# EAGLE board registers_full_wiring2 (EAGLE 9.5.2)
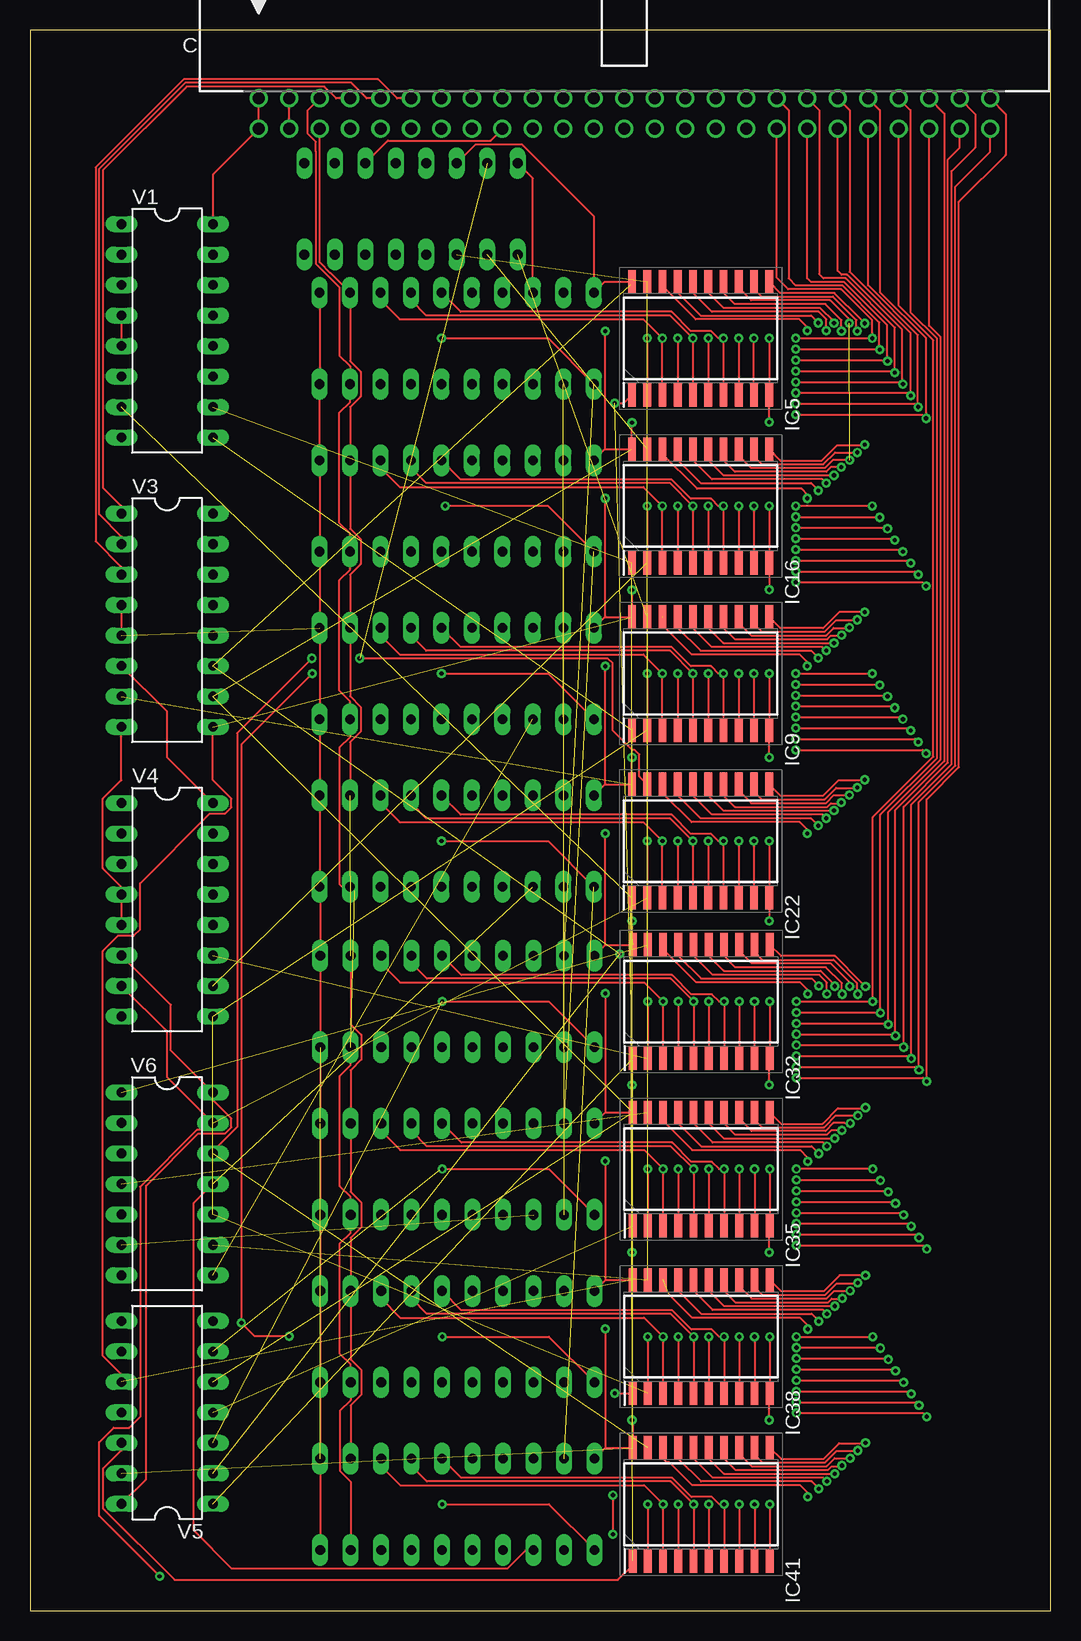
[diagram p0: board, top side]
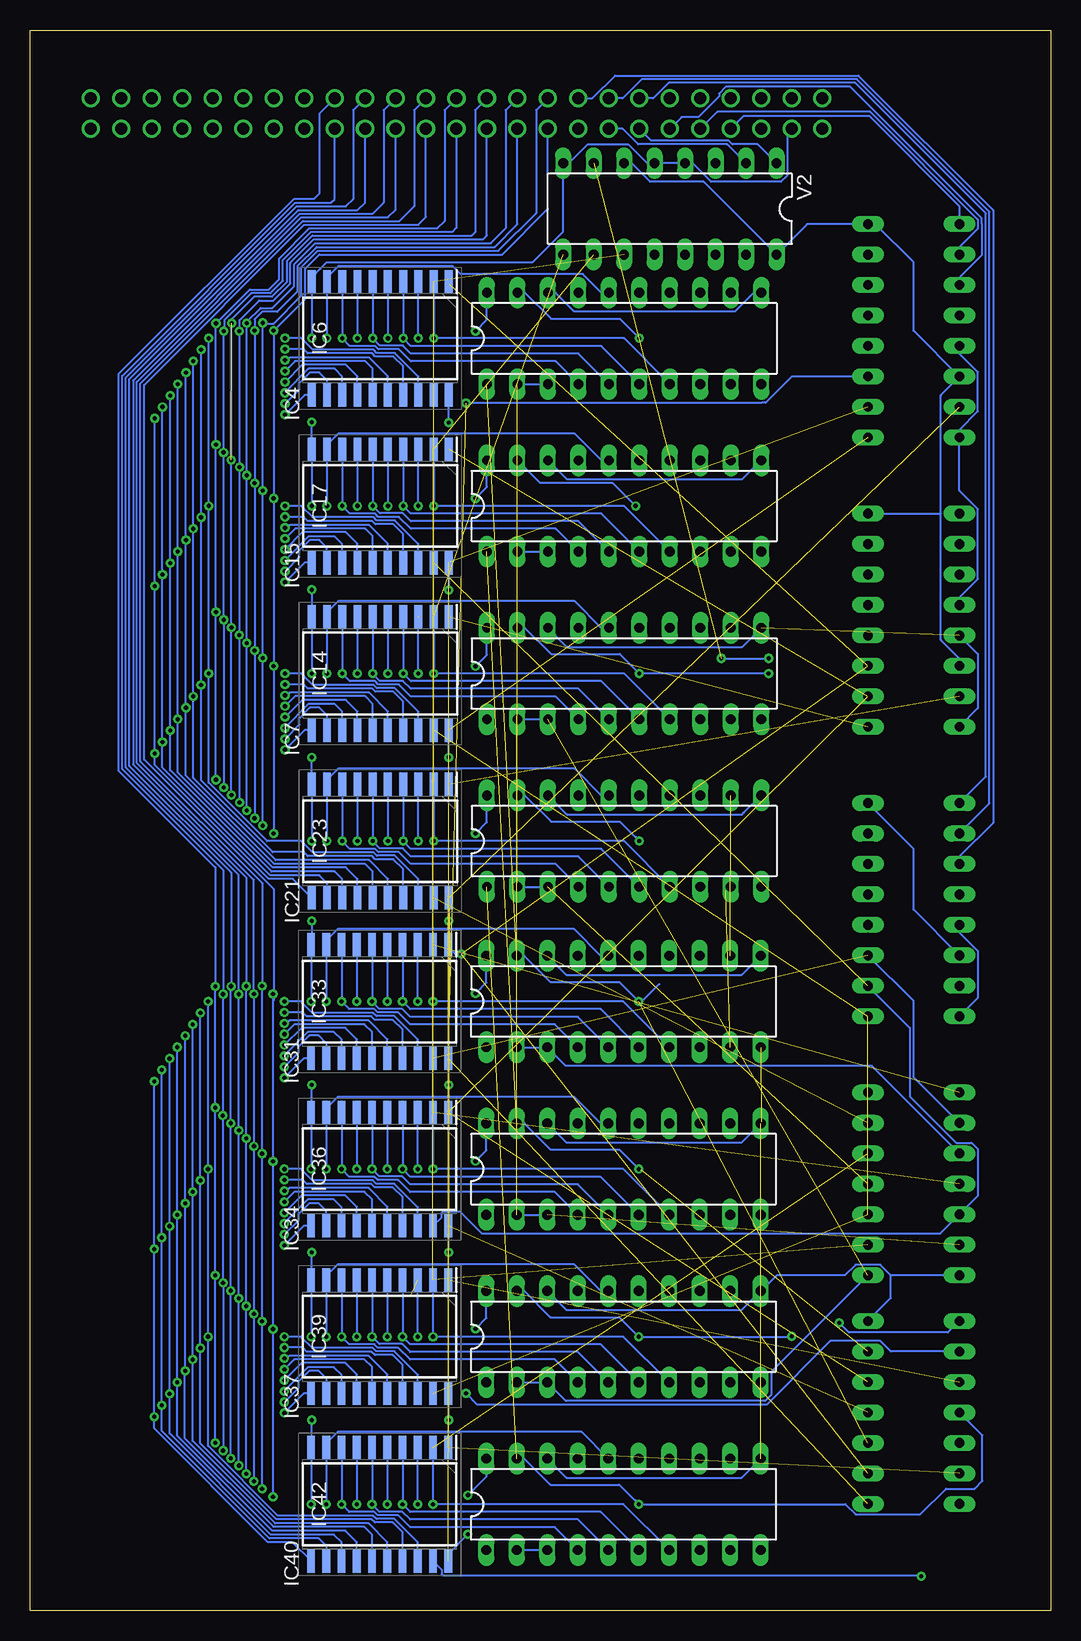
[diagram p1: board, bottom side, seen from below]

Size 85.07 x 131.75 mm. Coordinates in mm from the lower left corner, seen from the top.
Outline: 0,0 85.07,0 85.07,131.75 0,131.75 0,0
Copper layers (1*16): Top 0.035mm / dielectric 1.5mm / Bottom 0.035mm
Design rules "default *": minimum track width 6mil, minimum drill 0.35mm, track to track 6mil, track to pad 6mil, pad to pad 6mil, via to via 6mil, smd to smd 6mil, copper to edge 40mil, drill to drill 6mil, minimum pad ring 10mil, minimum via ring 8mil, stop-mask expansion 4mil, vias tented up to drill 0mil, thermal gap 10mil
tRestrict: area 61.9,5.1 to 81.6,126.4; area 61.9,5.1 to 62.2,126.4
bRestrict: area 41.6,5.1 to 77.8,126.4; area 41.9,113 to 61,125.7

## Footprints (pad centres in the part's own frame; a part is rotated, then mirrored left to right if it is on the bottom)
PAK100/2500-5-50 = drill 1 pad 1.422: 1 -30.48,-1.27; 2 -30.48,1.27; 3 -27.94,-1.27; 4 -27.94,1.27; 5 -25.4,-1.27; 6 -25.4,1.27; 7 -22.86,-1.27; 8 -22.86,1.27; 9 -20.32,-1.27; 10 -20.32,1.27; 11 -17.78,-1.27; 12 -17.78,1.27; 13 -15.24,-1.27; 14 -15.24,1.27; 15 -12.7,-1.27; 16 -12.7,1.27; 17 -10.16,-1.27; 18 -10.16,1.27; 19 -7.62,-1.27; 20 -7.62,1.27; 21 -5.08,-1.27; 22 -5.08,1.27; 23 -2.54,-1.27; 24 -2.54,1.27; 25 0,-1.27; 26 0,1.27; 27 2.54,-1.27; 28 2.54,1.27; 29 5.08,-1.27; 30 5.08,1.27; 31 7.62,-1.27; 32 7.62,1.27; 33 10.16,-1.27; 34 10.16,1.27; 35 12.7,-1.27; 36 12.7,1.27; 37 15.24,-1.27; 38 15.24,1.27; 39 17.78,-1.27; 40 17.78,1.27; 41 20.32,-1.27; 42 20.32,1.27; 43 22.86,-1.27; 44 22.86,1.27; 45 25.4,-1.27; 46 25.4,1.27; 47 27.94,-1.27; 48 27.94,1.27; 49 30.48,-1.27; 50 30.48,1.27
DIL20 = drill 0.813 long: 1 -11.43,-3.81; 2 -8.89,-3.81; 3 -6.35,-3.81; 4 -3.81,-3.81; 5 -1.27,-3.81; 6 1.27,-3.81; 7 3.81,-3.81; 8 6.35,-3.81; 9 8.89,-3.81; 10 11.43,-3.81; 11 11.43,3.81; 12 8.89,3.81; 13 6.35,3.81; 14 3.81,3.81; 15 1.27,3.81; 16 -1.27,3.81; 17 -3.81,3.81; 18 -6.35,3.81; 19 -8.89,3.81; 20 -11.43,3.81
SOIC127P1030X265-20N = smd 1.95 x 0.65: 1 -4.725,5.715; 2 -4.725,4.445; 3 -4.725,3.175; 4 -4.725,1.905; 5 -4.725,0.635; 6 -4.725,-0.635; 7 -4.725,-1.905; 8 -4.725,-3.175; 9 -4.725,-4.445; 10 -4.725,-5.715; 11 4.725,-5.715; 12 4.725,-4.445; 13 4.725,-3.175; 14 4.725,-1.905; 15 4.725,-0.635; 16 4.725,0.635; 17 4.725,1.905; 18 4.725,3.175; 19 4.725,4.445; 20 4.725,5.715
DIL16 = drill 0.813 long: 1 -8.89,-3.81; 2 -6.35,-3.81; 3 -3.81,-3.81; 4 -1.27,-3.81; 5 1.27,-3.81; 6 3.81,-3.81; 7 6.35,-3.81; 8 8.89,-3.81; 9 8.89,3.81; 10 6.35,3.81; 11 3.81,3.81; 12 1.27,3.81; 13 -1.27,3.81; 14 -3.81,3.81; 15 -6.35,3.81; 16 -8.89,3.81
DIL14 = drill 0.813 long: 1 -7.62,-3.81; 2 -5.08,-3.81; 3 -2.54,-3.81; 4 0,-3.81; 5 2.54,-3.81; 6 5.08,-3.81; 7 7.62,-3.81; 8 7.62,3.81; 9 5.08,3.81; 10 2.54,3.81; 11 0,3.81; 12 -2.54,3.81; 13 -5.08,3.81; 14 -7.62,3.81

## Placement (x,y rotation side)
C  2550-5  [PAK100/2500-5-50]  49.53,124.78 0 top
IC4  74HCT299N  [DIL20]  35.56,106.05 0 bottom
IC5  SN74CBT3345DW  [SOIC127P1030X265-20N]  55.88,106.05 90 top
IC6  SN74CBT3345DW  [SOIC127P1030X265-20N]  55.88,106.05 270 bottom
IC7  74HCT299N  [DIL20]  35.56,78.11 0 bottom
IC9  SN74CBT3345DW  [SOIC127P1030X265-20N]  55.88,78.11 90 top
IC14  SN74CBT3345DW  [SOIC127P1030X265-20N]  55.88,78.11 270 bottom
IC15  74HCT299N  [DIL20]  35.56,92.08 0 bottom
IC16  SN74CBT3345DW  [SOIC127P1030X265-20N]  55.88,92.08 90 top
IC17  SN74CBT3345DW  [SOIC127P1030X265-20N]  55.88,92.08 270 bottom
IC21  74HCT299N  [DIL20]  35.56,64.14 0 bottom
IC22  SN74CBT3345DW  [SOIC127P1030X265-20N]  55.88,64.14 90 top
IC23  SN74CBT3345DW  [SOIC127P1030X265-20N]  55.88,64.14 270 bottom
IC31  74HCT299N  [DIL20]  35.61,50.77 0 bottom
IC32  SN74CBT3345DW  [SOIC127P1030X265-20N]  55.93,50.77 90 top
IC33  SN74CBT3345DW  [SOIC127P1030X265-20N]  55.93,50.77 270 bottom
IC34  74HCT299N  [DIL20]  35.61,36.8 0 bottom
IC35  SN74CBT3345DW  [SOIC127P1030X265-20N]  55.93,36.8 90 top
IC36  SN74CBT3345DW  [SOIC127P1030X265-20N]  55.93,36.8 270 bottom
IC37  74HCT299N  [DIL20]  35.61,22.83 0 bottom
IC38  SN74CBT3345DW  [SOIC127P1030X265-20N]  55.93,22.83 90 top
IC39  SN74CBT3345DW  [SOIC127P1030X265-20N]  55.93,22.83 270 bottom
IC40  74HCT299N  [DIL20]  35.61,8.86 0 bottom
IC41  SN74CBT3345DW  [SOIC127P1030X265-20N]  55.93,8.86 90 top
IC42  SN74CBT3345DW  [SOIC127P1030X265-20N]  55.93,8.86 270 bottom
V1  74238N  [DIL16]  11.43,106.68 270 top
V2  74138N  [DIL16]  31.75,116.84 180 bottom
V3  74238N  [DIL16]  11.43,82.55 270 top
V4  74138N  [DIL16]  11.43,58.42 270 top
V5  7432N  [DIL14]  11.43,16.51 90 top
V6  7408N  [DIL14]  11.43,35.56 270 top

## Library data of the parts
C = con-3m; OC_FARNELL: 1788696; OC_NEWARK: unknown
IC4 IC7 IC15 IC21 IC31 IC34 IC37 IC40 = 74xx-eu
IC5 IC6 IC9 IC14 IC16 IC17 IC22 IC23 IC32 IC33 IC35 IC36 IC38 IC39 IC41 IC42 = SamacSys_Parts; DESCRIPTION: Texas Instruments SN74CBT3345DW, Bus Switch, 8 x 1:1, 4.5 5.5 V, 20-Pin SOIC; HEIGHT: 2.65mm; MANUFACTURER_NAME: Texas Instruments; MANUFACTURER_PART_NUMBER: SN74CBT3345DW
V1-V6 = 74ttl-din

## Nets
BUSA_BIT0: C.19 IC5.18 IC9.18 IC16.18 IC22.18
BUSA_BIT1: C.20 IC5.17 IC9.17 IC16.17 IC22.17
BUSA_BIT2: C.21 IC5.16 IC9.16 IC16.16 IC22.16
BUSA_BIT3: C.22 IC5.15 IC9.15 IC16.15 IC22.15
BUSA_BIT4: C.23 IC5.14 IC9.14 IC16.14 IC22.14
BUSA_BIT5: C.24 IC5.13 IC9.13 IC16.13 IC22.13
BUSA_BIT6: C.25 IC5.12 IC9.12 IC16.12 IC22.12
BUSA_BIT7: C.26 IC5.11 IC9.11 IC16.11 IC22.11
BUSA_BIT8: C.27 IC32.18 IC35.18 IC38.18 IC41.18
BUSA_BIT9: C.28 IC32.17 IC35.17 IC38.17 IC41.17
BUSA_BIT10: C.29 IC32.16 IC35.16 IC38.16 IC41.16
BUSA_BIT11: C.30 IC32.15 IC35.15 IC38.15 IC41.15
BUSA_BIT12: C.31 IC32.14 IC35.14 IC38.14 IC41.14
BUSA_BIT13: C.32 IC32.13 IC35.13 IC38.13 IC41.13
BUSA_BIT14: C.33 IC32.12 IC35.12 IC38.12 IC41.12
BUSA_BIT15: C.34 IC32.11 IC35.11 IC38.11 IC41.11
BUSA_REGIN0: C.7 V1.1
BUSA_REGIN1: C.9 V1.2
BUSA_REGIN2: C.11 V1.3
BUSA_REGOUT0: C.13 V2.1
BUSA_REGOUT1: C.15 V2.2
BUSA_REGOUT2: C.17 V2.3
BUSB_BIT0: C.35 IC6.18 IC14.18 IC17.18 IC23.18
BUSB_BIT1: C.36 IC6.17 IC14.17 IC17.17 IC23.17
BUSB_BIT2: C.37 IC6.16 IC14.16 IC17.16 IC23.16
BUSB_BIT3: C.38 IC6.15 IC14.15 IC17.15 IC23.15
BUSB_BIT4: C.39 IC6.14 IC14.14 IC17.14 IC23.14
BUSB_BIT5: C.40 IC6.13 IC14.13 IC17.13 IC23.13
BUSB_BIT6: C.41 IC6.12 IC14.12 IC17.12 IC23.12
BUSB_BIT7: C.42 IC6.11 IC14.11 IC17.11 IC23.11
BUSB_BIT8: C.43 IC33.18 IC36.18 IC39.18 IC42.18
BUSB_BIT9: C.44 IC33.17 IC36.17 IC39.17 IC42.17
BUSB_BIT10: C.45 IC33.16 IC36.16 IC39.16 IC42.16
BUSB_BIT11: C.46 IC33.15 IC36.15 IC39.15 IC42.15
BUSB_BIT12: C.47 IC33.14 IC36.14 IC39.14 IC42.14
BUSB_BIT13: C.48 IC33.13 IC36.13 IC39.13 IC42.13
BUSB_BIT14: C.49 IC33.12 IC36.12 IC39.12 IC42.12
BUSB_BIT15: C.50 IC33.11 IC36.11 IC39.11 IC42.11
BUSB_REGIN0: C.8 V3.1
BUSB_REGIN1: C.10 V3.2
BUSB_REGIN2: C.12 V3.3
BUSB_REGOUT0: C.14 V4.1
BUSB_REGOUT1: C.16 V4.2
BUSB_REGOUT2: C.18 V4.3
CLK: C.5 IC4.12 IC7.12 IC15.12 IC21.12 IC31.12 IC34.12 IC37.12 IC40.12
GND: C.3 C.4 IC4.10 IC4.11 IC4.18 IC5.10 IC6.10 IC7.10 IC7.11 IC7.18 IC9.10 IC14.10 IC15.10 IC15.11 IC15.18 IC16.10 IC17.10 IC21.10 IC21.11 IC21.18 IC22.10 IC23.10 IC31.10 IC31.11 IC31.18 IC32.10 IC33.10 IC34.10 IC34.11 IC34.18 IC35.10 IC36.10 IC37.10 IC37.11 IC37.18 IC38.10 IC39.10 IC40.10 IC40.11 IC40.18 IC41.10 IC42.10 V1.4 V1.5 V1.8 V2.4 V2.5 V2.8 V3.4 V3.5 V3.8 V4.4 V4.5 V4.8 V5.7 V6.7
N$1: IC34.16 IC35.9 IC36.9
N$2: IC16.1 IC35.1 V1.10 V5.4
N$3: IC16.19 IC35.19 V2.10 V6.4
N$4: IC4.2 IC4.3 IC31.2 IC31.3 V6.3
N$5: IC4.7 IC5.2 IC6.2
N$6: IC4.13 IC5.3 IC6.3
N$7: IC4.6 IC5.4 IC6.4
N$8: IC4.14 IC5.5 IC6.5
N$9: IC4.5 IC5.6 IC6.6
N$10: IC4.15 IC5.7 IC6.7
N$11: IC4.4 IC5.8 IC6.8
N$12: IC5.1 IC32.1 V1.11 V5.1
N$14: IC5.19 IC32.19 V2.11 V6.1
N$15: IC4.16 IC5.9 IC6.9
N$17: IC6.19 IC33.19 V4.11 V6.2
N$18: IC15.1 IC15.19 IC34.1 IC34.19 V5.6
N$19: IC15.2 IC15.3 IC34.2 IC34.3 V6.6
N$20: IC4.1 IC4.19 IC31.1 IC31.19 V5.3
N$22: IC7.7 IC9.2 IC14.2
N$23: IC7.13 IC9.3 IC14.3
N$24: IC7.6 IC9.4 IC14.4
N$25: IC7.14 IC9.5 IC14.5
N$26: IC17.1 IC36.1 V3.10 V5.5
N$27: IC17.19 IC36.19 V4.10 V6.5
N$28: IC7.5 IC9.6 IC14.6
N$29: IC14.1 IC39.1 V3.9 V5.10
N$30: IC7.1 IC7.19 IC37.1 IC37.19 V5.8
N$31: IC7.2 IC7.3 IC37.2 IC37.3 V6.8
N$32: IC23.1 IC42.1 V3.7 V5.13
N$33: IC9.1 IC38.1 V1.9 V5.9
N$34: IC9.19 IC38.19 V2.9 V6.9
N$35: IC7.15 IC9.7 IC14.7
N$36: IC7.4 IC9.8 IC14.8
N$37: IC7.16 IC9.9 IC14.9
N$40: IC14.19 IC39.19 V4.9 V6.10
N$41: IC15.7 IC16.2 IC17.2
N$42: IC15.13 IC16.3 IC17.3
N$43: IC15.6 IC16.4 IC17.4
N$44: IC15.14 IC16.5 IC17.5
N$45: IC15.5 IC16.6 IC17.6
N$46: IC15.15 IC16.7 IC17.7
N$47: IC15.4 IC16.8 IC17.8
N$48: IC15.16 IC16.9 IC17.9
N$50: IC21.1 IC21.19 IC40.1 IC40.19 V5.11
N$51: IC22.1 IC41.1 V1.7 V5.12
N$52: IC23.19 IC42.19 V4.7 V6.13
N$55: IC22.19 IC41.19 V2.7 V6.12
N$63: IC21.7 IC22.2 IC23.2
N$64: IC21.13 IC22.3 IC23.3
N$65: IC21.6 IC22.4 IC23.4
N$66: IC21.14 IC22.5 IC23.5
N$67: IC21.5 IC22.6 IC23.6
N$68: IC21.15 IC22.7 IC23.7
N$69: IC21.4 IC22.8 IC23.8
N$70: IC21.16 IC22.9 IC23.9
N$121: IC31.7 IC32.2 IC33.2
N$122: IC31.13 IC32.3 IC33.3
N$125: IC31.6 IC32.4 IC33.4
N$126: IC31.14 IC32.5 IC33.5
N$129: IC31.5 IC32.6 IC33.6
N$130: IC31.15 IC32.7 IC33.7
N$131: IC31.4 IC32.8 IC33.8
N$132: IC31.16 IC32.9 IC33.9
N$133: IC34.7 IC35.2 IC36.2
N$134: IC34.13 IC35.3 IC36.3
N$135: IC34.6 IC35.4 IC36.4
N$136: IC34.14 IC35.5 IC36.5
N$139: IC34.5 IC35.6 IC36.6
N$140: IC34.15 IC35.7 IC36.7
N$141: IC34.4 IC35.8 IC36.8
N$143: IC37.7 IC38.2 IC39.2
N$144: IC37.13 IC38.3 IC39.3
N$145: IC37.6 IC38.4 IC39.4
N$146: IC37.14 IC38.5 IC39.5
N$149: IC37.5 IC38.6 IC39.6
N$150: IC37.15 IC38.7 IC39.7
N$151: IC37.4 IC38.8 IC39.8
N$152: IC37.16 IC38.9 IC39.9
N$153: IC40.7 IC41.2 IC42.2
N$154: IC40.13 IC41.3 IC42.3
N$155: IC40.6 IC41.4 IC42.4
N$156: IC40.14 IC41.5 IC42.5
N$157: IC21.2 IC21.3 IC40.2 IC40.3 V6.11
N$159: IC40.5 IC41.6 IC42.6
N$160: IC40.15 IC41.7 IC42.7
N$161: IC40.4 IC41.8 IC42.8
N$162: IC40.16 IC41.9 IC42.9
N$163: IC6.1 IC33.1 V3.11 V5.2
STARTUP: C.6 IC4.9 IC7.9 IC15.9 IC21.9 IC31.9 IC34.9 IC37.9 IC40.9
VCC: C.1 C.2 IC4.20 IC5.20 IC6.20 IC7.20 IC9.20 IC14.20 IC15.20 IC16.20 IC17.20 IC21.20 IC22.20 IC23.20 IC31.20 IC32.20 IC33.20 IC34.20 IC35.20 IC36.20 IC37.20 IC38.20 IC39.20 IC40.20 IC41.20 IC42.20 V1.6 V1.16 V2.6 V2.16 V3.6 V3.16 V4.6 V4.16 V5.14 V6.14

## Tracks (layer width: path | path; a pad name or v marks a point on that pad's centre or on a via)
BUSA_BIT0  (via drill 0.35)  (1 unrouted)
  Top 0.152: v64.77,106.68 64.77,107 64.12,107.64 55.48,107.64 52.61,110.51 52.58,110.51 IC5.18 | v64.77,92.71 64.77,93.03 64.29,93.5 55.58,93.5 52.58,96.51 IC16.18 | v64.77,78.74 64.77,79.06 64.14,79.69 55.13,79.69 52.69,82.14 52.69,82.86 | v64.77,64.77 64.77,65.09 64.14,65.72 55.13,65.72 52.7,68.15 IC22.18
  Bottom 0.152: v64.77,64.77 v64.77,78.74 v64.77,92.71 v64.77,106.68 62.15,109.3 62.15,111.84 60.96,113.03 45.72,113.03 41.91,116.84 C.19
BUSA_BIT1  (via drill 0.35)
  Top 0.152: v65.68,107.33 65.68,107.36 65.09,107.95 55.88,107.95 53.98,109.86 IC5.17 | v65.68,93.36 65.68,93.39 65.09,93.98 55.88,93.98 53.98,95.89 IC16.17 | v65.68,79.39 65.68,79.42 65.09,80.01 55.88,80.01 53.98,81.92 IC9.17 | v65.68,65.42 65.68,65.45 65.09,66.04 55.88,66.04 53.98,67.94 IC22.17
  Bottom 0.152: v65.68,65.42 v65.68,79.39 v65.68,93.36 v65.68,107.33 65.64,107.29 64.77,107.29 62.45,109.6 62.45,111.97 61.09,113.33 46.04,113.33 42.89,116.48 42.89,125.06 C.20
BUSA_BIT2  (via drill 0.35)
  Top 0.152: v66.36,106.68 66.36,107.63 65.72,108.27 56.83,108.27 55.24,109.86 IC5.16 | v66.36,93.98 66.04,94.3 56.83,94.3 55.24,95.89 IC16.16 | v66.36,80.01 66.04,80.33 56.83,80.33 55.24,81.92 IC9.16 | v66.36,66.04 66.04,66.36 56.83,66.36 55.24,67.94 IC22.16
  Bottom 0.152: v66.36,66.04 v66.36,80.01 v66.36,93.98 v66.36,106.68 66.36,107.63 65.72,108.27 64.45,108.27 62.76,109.96 62.76,112.09 61.19,113.67 46.35,113.67 44.45,115.57 C.21
BUSA_BIT3  (via drill 0.35)
  Top 0.152: IC5.15 56.52,109.86 57.77,108.6 65.82,108.6 67,107.42 v67,107.32 | IC16.15 56.52,95.89 57.77,94.63 v67,94.63 v67,94.62 | IC9.15 56.52,81.92 57.77,80.66 v67,80.66 v67,80.65 | IC22.15 56.52,67.94 57.78,66.68 v67,66.68
  Bottom 0.152: C.22 45.43,125.06 45.43,115.21 46.67,113.97 61.31,113.97 63.06,112.22 63.06,110.41 64.9,108.57 65.85,108.57 67,107.42 v67,107.32 v67,94.62 v67,80.65 v67,66.68
BUSA_BIT4  (via drill 0.35, 0.35 pad 0.55)
  Top 0.152: IC5.14 57.78,109.86 58.74,108.9 66.28,108.9 67.61,107.57 67.61,106.67 v67.63,106.65 | IC16.14 57.78,95.89 58.74,94.93 66.36,94.93 66.73,95.3 v67.61,95.3 | IC9.14 57.78,81.92 58.74,80.96 66.45,80.96 66.75,81.26 67.59,81.26 v67.63,81.31 | IC22.14 57.78,67.94 58.74,66.99 66.45,66.99 66.75,67.29 67.53,67.29 v67.61,67.36
  Bottom 0.152: C.23 46.99,114.62 47.31,114.3 61.41,114.3 63.37,112.34 63.37,110.62 64.79,109.2 65.98,109.2 67.61,107.57 67.61,106.67 v67.63,106.65 67.61,106.63 v67.61,95.3 67.61,81.33 | v67.61,67.36 67.61,81.33 | v67.63,81.31 67.61,81.33
BUSA_BIT5  (via drill 0.35, 0.35 pad 0.55)  (1 unrouted)
  Top 0.152: IC5.13 59.05,110.25 60.09,109.22 66.67,109.22 68.26,107.63 v68.26,107.31 | IC16.13 59.05,96.28 60.09,95.25 66.24,95.25 66.9,95.91 67.86,95.91 67.87,95.9 v68.3,95.9 | IC9.13 59.05,82.31 60.09,81.28 66.34,81.28 66.97,81.91 68.26,81.91 v68.28,81.94 | IC22.13 59.05,68.34 60.09,67.31 66.34,67.31 67,67.97 v68.28,67.97
  Bottom 0.152: C.24 47.97,125.06 47.97,114.91 48.27,114.61 61.54,114.61 63.67,112.47 63.67,110.75 64.92,109.5 66.39,109.5 68.28,107.61 68.28,95.57 | v68.28,67.97 v68.28,81.94 68.28,95.57 | 68.28,95.57 68.3,95.58 v68.3,95.9
BUSA_BIT6  (via drill 0.35, 0.35 pad 0.55)
  Top 0.152: IC5.12 60.33,110.16 60.96,109.53 66.91,109.53 68.87,107.57 68.87,106.71 v68.93,106.65 | IC16.12 60.33,96.19 60.96,95.56 66.12,95.56 67.1,96.53 v68.94,96.53 | IC9.12 60.33,82.22 60.96,81.58 66.21,81.58 67.17,82.55 68.89,82.55 v68.93,82.58 | IC22.12 60.33,68.25 60.96,67.61 66.21,67.61 67.17,68.58 68.89,68.58 v68.93,68.61
  Bottom 0.152: v68.93,68.61 v68.93,82.58 68.93,96.84 | v68.93,68.61 | 68.93,96.84 v68.93,106.65 | 68.93,96.84 68.94,96.82 v68.94,96.53 | v68.93,106.65 | v68.93,106.65 68.87,106.71 68.87,107.57 66.63,109.81 65.04,109.81 64,110.85 64,112.58 61.66,114.91 49.87,114.91 49.53,115.25 C.25
BUSA_BIT7  (via drill 0.35, 0.35 pad 0.55)
  Top 0.152: IC5.11 62.53,109.83 67.04,109.83 69.17,107.69 v69.57,107.29 | IC9.11 62.53,81.89 66.09,81.89 67.42,83.22 v69.57,83.22 | IC22.11 62.53,67.92 66.09,67.92 67.38,69.22 69.53,69.22 v69.57,69.25 | IC16.11 62.53,95.86 65.99,95.86 67.27,97.14 69.52,97.14 v69.57,97.19 | v69.57,83.22
  Bottom 0.152: v69.57,69.25 v69.57,83.22 | v69.57,83.22 | v69.57,83.22 v69.57,97.19 | v69.57,97.19 | v69.57,107.29 | v69.57,97.19 v69.57,107.29 | v69.57,107.29 69.17,107.69 66.75,110.11 65.17,110.11 64.3,110.98 64.3,112.7 61.79,115.21 51.12,115.21 50.51,115.82 50.51,125.06 C.26
BUSA_BIT8  (via drill 0.35)  (1 unrouted)
  Top 0.152: v64.82,51.4 64.82,51.72 64.17,52.37 55.53,52.37 52.67,55.23 52.63,55.23 IC32.18 | v64.82,37.43 64.82,37.75 64.19,38.38 55.18,38.38 52.76,40.81 IC35.18 52.63,41.23 | v64.82,23.46 64.82,23.78 64.19,24.41 55.18,24.41 53.28,26.32 | v64.82,9.49 64.82,9.81 64.19,10.44 55.18,10.44 53.28,12.35 53.07,12.35 52.76,12.67 IC41.18 | 52.63,27.73 IC38.18
  Bottom 0.152: v64.82,51.4 64.82,50.8 | 64.82,50.8 v64.82,37.43 v64.82,23.46 v64.82,9.49 | C.27 52.07,116.15 52.7,115.52 62.2,115.52 75.56,102.16 75.56,70.93 64.77,60.13 64.77,50.85 64.82,50.8
BUSA_BIT9  (via drill 0.35)
  Top 0.152: v65.73,52.05 65.73,52.08 65.14,52.67 55.93,52.67 54.03,54.58 IC32.17 | v65.73,38.08 65.73,38.11 65.14,38.7 55.93,38.7 54.03,40.61 IC35.17 | v65.73,24.11 65.73,24.14 65.14,24.73 55.93,24.73 54.03,26.64 IC38.17 | v65.73,10.14 65.73,10.17 65.14,10.76 55.93,10.76 54.03,12.67 IC41.17
  Bottom 0.152: v65.73,10.14 v65.73,24.11 v65.73,38.08 65.73,51.75 | 65.73,51.75 v65.73,52.05 | C.28 53.05,125.06 53.05,117.06 54.29,115.82 62.33,115.82 75.87,102.28 75.87,70.79 65.72,60.64 65.72,51.76 65.73,51.75
BUSA_BIT10  (via drill 0.35)
  Top 0.152: v66.41,51.4 66.41,52.35 65.77,52.99 56.88,52.99 55.3,54.58 IC32.16 | v66.41,38.7 66.09,39.02 56.88,39.02 55.3,40.61 IC35.16 | v66.41,24.73 66.09,25.05 56.88,25.05 55.3,26.64 IC38.16 | v66.41,10.76 66.09,11.08 56.88,11.08 55.3,12.67 IC41.16
  Bottom 0.152: v66.41,10.76 v66.41,24.73 v66.41,38.7 v66.41,51.4 66.41,60.9 76.17,70.66 76.17,102.41 62.46,116.13 55.24,116.13 54.61,116.76 C.29
BUSA_BIT11  (via drill 0.35)
  Top 0.152: IC32.15 56.57,54.58 57.82,53.32 65.88,53.32 67.05,52.14 v67.05,52.04 | IC35.15 56.57,40.61 57.82,39.35 v67.05,39.35 v67.05,39.34 | IC38.15 56.57,26.64 57.82,25.38 v67.05,25.38 v67.05,25.37 | IC41.15 56.57,12.67 57.83,11.4 v67.05,11.4
  Bottom 0.152: v67.05,11.4 v67.05,25.37 v67.05,39.34 v67.05,52.04 67.05,61.11 76.48,70.54 76.48,102.54 62.58,116.43 56.52,116.43 55.59,117.36 55.59,125.06 C.30
BUSA_BIT12  (via drill 0.35, 0.35 pad 0.55)
  Top 0.152: IC32.14 57.84,54.58 58.79,53.62 66.33,53.62 67.66,52.3 67.66,51.39 v67.68,51.37 | IC35.14 57.84,40.61 58.79,39.65 66.41,39.65 66.78,40.02 v67.66,40.02 | IC38.14 57.84,26.64 58.79,25.68 66.5,25.68 66.8,25.98 67.64,25.98 v67.68,26.03 | IC41.14 57.84,12.67 58.79,11.71 66.5,11.71 66.8,12.01 67.59,12.01 v67.66,12.08
  Bottom 0.152: v67.66,12.08 67.66,26.05 | v67.68,26.03 67.66,26.05 | 67.66,26.05 v67.66,40.02 67.66,51.35 v67.68,51.37 67.68,61.31 76.78,70.41 76.78,102.66 62.71,116.74 57.78,116.74 57.15,117.37 C.31
BUSA_BIT13  (via drill 0.35, 0.35 pad 0.55)
  Top 0.152: IC32.13 59.11,54.98 60.14,53.94 66.73,53.94 68.31,52.35 v68.31,52.04 | IC35.13 59.11,41.01 60.14,39.97 66.3,39.97 66.95,40.63 67.91,40.63 67.92,40.62 v68.35,40.62 | IC38.13 59.11,27.04 60.14,26 66.39,26 67.02,26.63 68.31,26.63 v68.34,26.66 | IC41.13 59.11,13.06 60.14,12.03 66.39,12.03 67.05,12.69 v68.34,12.69
  Bottom 0.152: C.32 58.13,125.06 58.13,117.65 58.74,117.04 62.84,117.04 77.09,102.79 77.09,70.28 68.31,61.51 v68.31,52.04 68.35,52 v68.35,40.62 68.34,40.61 v68.34,26.66 v68.34,12.69
BUSA_BIT14  (via drill 0.35, 0.35 pad 0.55)
  Top 0.152: IC32.12 60.38,54.88 61.01,54.25 66.96,54.25 68.92,52.29 68.92,51.43 v68.98,51.37 | IC35.12 60.38,40.91 61.01,40.28 66.17,40.28 67.15,41.26 v69,41.26 | IC38.12 60.38,26.94 61.01,26.31 66.26,26.31 67.22,27.27 68.94,27.27 v68.98,27.3 | IC41.12 60.38,12.97 61.01,12.34 66.26,12.34 67.22,13.3 68.94,13.3 v68.98,13.33
  Bottom 0.152: v68.98,13.33 v68.98,27.3 68.98,41.56 | v68.98,13.33 | 68.98,41.56 v68.98,51.37 | 68.98,41.56 69,41.54 v69,41.26 | v68.98,51.37 | C.33 59.69,117.67 60.01,117.35 62.96,117.35 77.39,102.92 77.39,70.16 68.98,61.74 v68.98,51.37
BUSA_BIT15  (via drill 0.35, 0.35 pad 0.55)
  Top 0.152: IC32.11 62.59,54.55 67.09,54.55 69.23,52.41 v69.62,52.02 | IC38.11 62.59,26.61 66.14,26.61 67.47,27.94 v69.62,27.94 | IC41.11 62.59,12.64 66.14,12.64 67.44,13.94 69.59,13.94 v69.62,13.97 | IC35.11 62.59,40.58 66.04,40.58 67.33,41.86 69.57,41.86 v69.62,41.91 | v69.62,27.94
  Bottom 0.152: v69.62,13.97 v69.62,27.94 | v69.62,27.94 | v69.62,27.94 v69.62,41.91 | v69.62,41.91 | v69.62,52.02 | v69.62,41.91 v69.62,52.02 | C.34 60.96,124.78 60.96,118.11 61.42,117.65 63.09,117.65 77.7,103.04 77.7,70.03 69.62,61.96 v69.62,52.02
BUSA_REGIN0
  Bottom 0.152: V1.1 7.62,117.06 15.15,124.59 25.59,124.59 C.7
BUSA_REGIN1
  Bottom 0.152: C.9 27.8,124.92 15.05,124.92 6.07,115.94 6.07,115.2 7.62,113.65 V1.2
BUSA_REGIN2
  Bottom 0.152: V1.3 7.62,111.11 5.73,113 5.73,115.57 5.77,115.61 5.77,116.06 16.73,127.03 26.67,127.03 | 26.67,127.03 27.08,127.03 27.65,126.45 27.65,126.22 29.38,124.49 30.77,124.49 C.11 | 26.67,127.03
BUSA_REGOUT0
  Bottom 0.152: V2.1 24.43,122.22 26.54,122.22 26.84,122.53 33.31,122.53 C.13
BUSA_REGOUT1
  Bottom 0.152: V2.2 26.97,122.22 34.39,122.22 35.68,123.51 C.15
BUSA_REGOUT2
  Top 0.152: V2.3 29.82,122.53 38.39,122.53 C.17
BUSB_BIT0  (via drill 0.35)
  Top 0.152: v63.82,106.05 v70.18,106.05 70.18,107.55 67.59,110.13 63.18,110.13 62.23,111.09 C.35 | v63.82,78.11 v70.18,78.11 | v70.18,92.08 v63.82,92.08
  Bottom 0.152: IC6.18 52.7,102.87 54.66,104.83 56.16,104.83 56.44,105.11 61.51,105.11 62.45,106.05 v63.82,106.05 | IC17.18 52.7,88.9 54.66,90.86 56.16,90.86 56.44,91.14 61.51,91.14 62.45,92.08 v63.82,92.08 | IC14.18 52.7,74.93 54.66,76.89 56.16,76.89 56.44,77.17 61.51,77.17 62.45,78.11 v63.82,78.11 | IC23.18 52.7,60.96 54.66,62.92 56.16,62.92 56.44,63.2 61.51,63.2 62.45,64.14 65.31,64.14 70.18,69 v70.18,78.11 70.18,91.76 | 70.18,91.76 v70.18,106.05 | v70.18,106.05 | 70.18,91.76 v70.18,92.08
BUSB_BIT1  (via drill 0.35, 0.35 pad 0.55)
  Top 0.152: v63.82,91.17 70.77,91.17 v70.81,91.12 | v63.82,77.2 70.77,77.2 v70.82,77.15 | v63.82,105.14 70.77,105.14 v70.81,105.09 70.78,105.12 70.78,107.37 67.72,110.44 63.82,110.44 63.21,111.04 63.21,125.06 C.36
  Bottom 0.152: v63.82,105.14 62.27,105.14 61.94,104.8 56.56,104.8 56.29,104.52 54.79,104.52 53.98,103.71 IC6.17 | v63.82,91.17 62.27,91.17 61.94,90.83 56.56,90.83 56.29,90.55 54.79,90.55 53.98,89.74 IC17.17 | v63.82,77.2 62.27,77.2 61.94,76.86 56.56,76.86 56.29,76.58 54.79,76.58 53.98,75.77 IC14.17 | IC23.17 53.98,61.8 54.79,62.61 56.29,62.61 56.56,62.89 61.94,62.89 62.27,63.23 64.84,63.23 70.82,69.2 v70.82,77.15 70.82,77.45 70.81,77.46 v70.81,91.12 v70.81,105.09
BUSB_BIT2  (via drill 0.35, 0.35 pad 0.55)
  Top 0.152: v63.82,76.29 71.37,76.29 v71.46,76.2 | v63.82,90.26 71.37,90.26 v71.46,90.17 | v63.82,104.23 71.37,104.23 v71.46,104.14 71.42,104.18 71.42,107.16 67.84,110.74 65.09,110.74 64.77,111.06 C.37
  Bottom 0.152: IC6.16 55.24,102.89 56.81,104.46 63.41,104.46 63.64,104.23 v63.82,104.23 | IC17.16 55.24,88.92 56.81,90.49 63.41,90.49 63.64,90.26 v63.82,90.26 | IC14.16 55.24,74.95 56.81,76.52 63.41,76.52 63.64,76.29 v63.82,76.29 | IC23.16 55.24,60.98 56.81,62.55 64.6,62.55 71.46,69.41 v71.46,76.2 v71.46,90.17 v71.46,104.14
BUSB_BIT3  (via drill 0.35, 0.35 pad 0.55)
  Top 0.152: v63.82,75.38 71.94,75.38 v72.07,75.25 | v63.82,89.35 71.94,89.35 v72.07,89.22 | v63.82,103.32 71.94,103.32 v72.07,103.19 72.07,106.95 67.97,111.05 66.12,111.05 65.75,111.41 65.75,125.06 C.38
  Bottom 0.152: v63.82,103.32 62.98,104.15 57.15,104.15 56.52,103.52 IC6.15 | v63.82,89.35 62.98,90.18 57.15,90.18 56.52,89.55 IC17.15 | v63.82,75.38 62.98,76.21 57.15,76.21 56.52,75.58 IC14.15 | IC23.15 56.52,61.61 57.15,62.24 64.72,62.24 72.1,69.62 72.1,75.22 v72.07,75.25 v72.07,89.22 v72.07,103.19
BUSB_BIT4  (via drill 0.35, 0.35 pad 0.55)
  Top 0.152: v63.82,88.44 72.57,88.44 v72.75,88.27 | v63.82,74.47 72.57,74.47 v72.75,74.3 | v63.82,102.41 72.57,102.41 v72.75,102.23 72.68,102.3 72.68,106.77 68.09,111.35 67.63,111.35 67.31,111.67 C.39
  Bottom 0.152: IC6.14 57.78,102.89 58.74,103.85 62.38,103.85 v63.82,102.41 | IC17.14 57.78,88.92 58.74,89.88 62.38,89.88 v63.82,88.44 | IC14.14 57.78,74.95 58.74,75.91 62.38,75.91 v63.82,74.47 | IC23.14 57.78,60.98 58.74,61.94 64.85,61.94 72.75,69.83 v72.75,74.3 v72.75,88.27 v72.75,102.23
BUSB_BIT5  (via drill 0.35, 0.35 pad 0.55)
  Top 0.152: v63.82,87.53 73.17,87.53 v73.39,87.31 | v63.82,73.56 73.17,73.56 v73.39,73.34 | v63.82,101.5 73.17,101.5 v73.39,101.28 73.39,106.49 68.29,111.59 68.29,125.06 C.40
  Bottom 0.152: IC6.13 59.05,102.87 59.69,103.5 61.86,103.5 63.82,101.55 v63.82,101.5 | IC17.13 59.05,88.9 59.69,89.53 61.86,89.53 63.82,87.58 v63.82,87.53 | IC14.13 59.05,74.93 59.69,75.56 61.86,75.56 63.82,73.61 v63.82,73.56 | IC23.13 59.05,60.96 59.69,61.59 64.94,61.59 73.39,70.05 v73.39,73.34 v73.39,87.31 v73.39,101.28
BUSB_BIT6  (via drill 0.35, 0.35 pad 0.55)
  Top 0.152: v63.82,72.65 73.77,72.65 v74.03,72.39 | v63.82,86.62 73.77,86.62 v74.03,86.36 | v63.82,100.59 73.77,100.59 v74.03,100.33 74,100.37 74,106.31 69.85,110.46 C.41
  Bottom 0.152: v63.82,100.59 62.62,101.78 62.62,102.31 61.74,103.2 60.96,103.2 60.33,102.56 IC6.12 | v63.82,86.62 62.62,87.81 62.62,88.34 61.74,89.23 60.96,89.23 60.33,88.59 IC17.12 | IC14.12 60.33,74.62 60.96,75.26 61.74,75.26 62.62,74.37 62.62,73.84 v63.82,72.65 | IC23.12 60.33,60.66 60.96,61.29 65.06,61.29 74.03,70.26 v74.03,72.39 v74.03,86.36 v74.03,100.33
BUSB_BIT7  (via drill 0.35, 0.35 pad 0.55)
  Top 0.152: v63.82,71.74 74.37,71.74 v74.67,71.44 | v63.82,85.71 74.37,85.71 v74.67,85.41 | v63.82,99.68 74.37,99.68 v74.67,99.38 74.67,106.07 70.83,109.91 70.83,125.06 C.42
  Bottom 0.152: IC6.11 62.19,101.32 63.82,99.69 v63.82,99.68 | IC17.11 62.19,87.35 63.82,85.72 v63.82,85.71 | IC14.11 62.19,73.38 63.82,71.75 v63.82,71.74 | v74.67,99.38 v74.67,85.41 v74.67,71.44 74.67,70.47 65.19,60.98 63.17,60.98 IC23.11
BUSB_BIT8  (via drill 0.35)
  Top 0.152: v63.87,50.77 v70.23,50.77 70.23,66.14 75.28,71.19 75.28,105.89 72.39,108.78 C.43 | v63.87,22.83 v70.23,22.83 | v70.23,36.8 v63.87,36.8
  Bottom 0.152: IC33.18 52.76,47.59 54.72,49.55 56.21,49.55 56.49,49.83 61.56,49.83 62.51,50.77 v63.87,50.77 | IC36.18 52.76,33.62 54.72,35.58 56.21,35.58 56.49,35.86 61.56,35.86 62.51,36.8 v63.87,36.8 | IC39.18 52.76,19.65 54.72,21.61 56.21,21.61 56.49,21.89 61.56,21.89 62.51,22.83 v63.87,22.83 | IC42.18 52.76,5.68 54.72,7.64 56.21,7.64 56.49,7.92 64.42,7.92 70.23,13.72 v70.23,22.83 70.23,36.48 | 70.23,36.48 v70.23,50.77 | v70.23,50.77 | 70.23,36.48 v70.23,36.8
BUSB_BIT9  (via drill 0.35, 0.35 pad 0.55)
  Top 0.152: v63.87,35.89 70.82,35.89 v70.87,35.84 | v63.87,21.92 70.83,21.92 v70.87,21.87 | v63.87,49.86 70.82,49.86 v70.87,49.81 70.87,66.34 75.58,71.06 75.58,106.02 73.37,108.23 73.37,125.06 C.44
  Bottom 0.152: v63.87,49.86 62.33,49.86 61.99,49.52 56.62,49.52 56.34,49.24 54.84,49.24 54.03,48.43 IC33.17 | v63.87,35.89 62.33,35.89 61.99,35.55 56.62,35.55 56.34,35.27 54.84,35.27 54.03,34.46 IC36.17 | v63.87,21.92 62.33,21.92 61.99,21.58 56.62,21.58 56.34,21.3 54.84,21.3 54.03,20.49 IC39.17 | IC42.17 54.03,6.52 54.84,7.33 56.34,7.33 56.62,7.61 64.56,7.61 70.87,13.92 v70.87,21.87 70.87,22.18 v70.87,35.84 v70.87,49.81
BUSB_BIT10  (via drill 0.35, 0.35 pad 0.55)
  Top 0.152: v63.87,21.01 71.42,21.01 v71.51,20.92 | v63.87,34.98 71.42,34.98 v71.51,34.89 | v63.87,48.95 71.42,48.95 v71.51,48.86 71.51,66.56 75.89,70.93 75.89,106.14 74.93,107.1 C.45
  Bottom 0.152: IC33.16 55.3,47.62 56.86,49.18 63.47,49.18 63.7,48.95 v63.87,48.95 | IC36.16 55.3,33.65 56.86,35.21 63.47,35.21 63.7,34.98 v63.87,34.98 | IC39.16 55.3,19.68 56.86,21.24 63.47,21.24 63.7,21.01 v63.87,21.01 | IC42.16 55.3,5.71 56.86,7.27 64.65,7.27 71.51,14.13 v71.51,20.92 v71.51,34.89 v71.51,48.86
BUSB_BIT11  (via drill 0.35, 0.35 pad 0.55)
  Top 0.152: v63.87,20.1 71.99,20.1 v72.12,19.97 | v63.87,34.07 71.99,34.07 v72.12,33.94 | v63.87,48.04 71.99,48.04 v72.12,47.91 72.12,66.74 76.19,70.81 76.19,124.78 C.46
  Bottom 0.152: v63.87,48.04 63.03,48.87 57.2,48.87 56.57,48.24 IC33.15 | v63.87,34.07 63.03,34.9 57.2,34.9 56.57,34.27 IC36.15 | v63.87,20.1 63.03,20.93 57.2,20.93 56.57,20.3 IC39.15 | IC42.15 56.57,6.33 57.2,6.96 64.78,6.96 72.16,14.34 72.16,19.94 v72.12,19.97 v72.12,33.94 v72.12,47.91
BUSB_BIT12  (via drill 0.35, 0.35 pad 0.55)
  Top 0.152: v63.87,33.16 72.62,33.16 v72.8,32.99 | v63.87,19.19 72.62,19.19 v72.8,19.02 | v63.87,47.13 72.62,47.13 v72.8,46.96 72.8,66.98 76.5,70.68 76.5,120.95 77.47,121.92 C.47
  Bottom 0.152: IC33.14 57.84,47.62 58.79,48.57 62.43,48.57 v63.87,47.13 | IC36.14 57.84,33.65 58.79,34.6 62.43,34.6 v63.87,33.16 | IC39.14 57.84,19.68 58.79,20.63 62.43,20.63 v63.87,19.19 | IC42.14 57.84,5.71 58.79,6.66 64.9,6.66 72.8,14.55 v72.8,19.02 v72.8,32.99 v72.8,46.96
BUSB_BIT13  (via drill 0.35, 0.35 pad 0.55)
  Top 0.152: v63.87,32.25 73.22,32.25 v73.44,32.03 | v63.87,18.28 73.22,18.28 v73.44,18.06 | v63.87,46.22 73.22,46.22 v73.44,46 73.44,67.19 76.8,70.56 76.8,119.98 78.77,121.95 78.77,124.75 C.48
  Bottom 0.152: IC33.13 59.11,47.59 59.74,48.23 61.92,48.23 63.87,46.27 v63.87,46.22 | IC36.13 59.11,33.62 59.74,34.26 61.92,34.26 63.87,32.3 v63.87,32.25 | IC39.13 59.11,19.65 59.74,20.29 61.92,20.29 63.87,18.33 v63.87,18.28 | IC42.13 59.11,5.68 59.74,6.32 64.99,6.32 73.44,14.77 v73.44,18.06 v73.44,32.03 v73.44,46
BUSB_BIT14  (via drill 0.35, 0.35 pad 0.55)
  Top 0.152: v63.87,17.37 73.82,17.37 v74.08,17.11 | v63.87,31.34 73.82,31.34 v74.08,31.08 | v63.87,45.31 73.82,45.31 v74.08,45.05 74.08,67.4 77.11,70.43 77.11,118.7 80.01,121.6 C.49
  Bottom 0.152: v63.87,45.31 62.68,46.51 62.68,47.03 61.79,47.92 61.01,47.92 60.38,47.29 IC33.12 | v63.87,31.34 62.68,32.53 62.68,33.06 61.79,33.95 61.01,33.95 60.38,33.32 IC36.12 | IC39.12 60.38,19.35 61.01,19.98 61.79,19.98 62.68,19.09 62.68,18.57 v63.87,17.37 | IC42.12 60.38,5.38 61.01,6.01 65.11,6.01 74.08,14.98 v74.08,17.11 v74.08,31.08 v74.08,45.05
BUSB_BIT15  (via drill 0.35, 0.35 pad 0.55)
  Top 0.152: v63.87,16.46 74.42,16.46 v74.72,16.16 | v63.87,30.43 74.42,30.43 v74.72,30.13 | v63.87,44.4 74.42,44.4 v74.72,44.1 74.72,67.61 77.41,70.3 77.41,117.42 81.31,121.31 81.31,124.75 C.50
  Bottom 0.152: IC33.11 62.24,46.04 63.87,44.42 v63.87,44.4 | IC36.11 62.24,32.07 63.87,30.45 v63.87,30.43 | IC39.11 62.24,18.1 63.87,16.48 v63.87,16.46 | v74.72,44.1 v74.72,30.13 v74.72,16.16 74.72,15.19 65.24,5.71 63.22,5.71 IC42.11
BUSB_REGIN0
  Top 0.152: C.8 25.52,126.05 24.54,127.03 13.05,127.03 6.07,120.05 6.07,93.62 7.62,92.08 V3.1
BUSB_REGIN1
  Top 0.152: C.10 28.06,126.05 26.77,127.33 12.92,127.33 5.77,120.18 5.77,91.38 7.62,89.52 V3.2
BUSB_REGIN2
  Top 0.152: C.12 30.6,126.05 29.01,127.64 12.79,127.64 5.46,120.31 5.46,89.14 7.62,86.98 V3.3
BUSB_REGOUT0
  Bottom 0.152: C.14 33.14,126.05 31.84,127.35 16.3,127.35 5.42,116.47 5.42,69.51 V4.1
BUSB_REGOUT1
  Bottom 0.152: V4.2 5.12,67.27 5.12,116.6 16.17,127.65 34.08,127.65 35.68,126.05 C.16
BUSB_REGOUT2
  Bottom 0.152: C.18 38.22,126.05 36.31,127.96 16.05,127.96 4.81,116.72 4.81,65.66 7.62,62.85 V4.3
CLK  (1 unrouted)
  Top 0.152: IC21.12 26.67,72.38 27.56,73.27 27.56,75.32 26.67,76.21 IC7.12 26.67,86.35 27.56,87.24 27.56,89.29 26.67,90.18 IC15.12 26.67,100.32 27.56,101.21 27.56,103.26 26.67,104.15 IC4.12 25.04,111.48 25.03,111.48 24.13,112.38 C.5 | IC31.12 26.72,48.87 27.61,47.98 27.61,45.93 26.72,45.04 IC34.12 26.72,34.9 27.61,34.02 27.61,31.96 26.72,31.07 IC37.12 26.72,20.93 27.61,20.05 27.61,17.99 26.72,17.1 IC40.12
GND  (via drill 0.35)  (6 unrouted)
  Top 0.152: v61.65,8.86 IC41.10 | v61.65,22.83 IC38.10 61.59,18.05 v61.59,15.88 | v61.65,50.77 61.65,46.35 | 61.65,46.35 IC32.10 | v61.65,36.8 IC35.10 61.59,32.02 v61.59,29.84 | IC40.10 IC31.10 IC31.11 24.18,60.27 IC21.10 IC21.11 | v61.59,106.05 IC5.10 v61.59,99.06 | v61.59,92.08 IC16.10 v61.59,85.09 | v61.59,78.11 IC9.10 v61.59,71.12 | v61.59,64.14 IC22.10 v61.59,57.47 | v61.59,43.81 61.59,46.3 61.65,46.35 | C.3 C.4 | V1.4 V1.5 | V3.4 V3.5 | V4.5 V4.4 7.62,60.31 6.07,61.86 6.07,67.68 7.62,69.23 V3.8 | IC4.11 IC4.10 IC15.11 IC15.10 IC7.11 IC7.10 IC21.11 | 24.13,67.31 IC21.11 | IC4.18 41.91,119.38 V2.8
  Bottom 0.152: 24.08,102.51 IC4.10 | 24.13,47.23 IC31.10 | v61.65,8.86 IC42.10 61.59,13.63 v61.59,15.88 | v61.65,22.83 IC39.10 61.59,27.6 v61.59,29.84 | IC37.18 40.37,25.05 25.77,25.05 IC37.11 24.13,26.64 22.83,27.94 17.16,27.94 16.27,28.83 14.21,28.83 13.32,27.94 | IC34.18 40.37,39.02 25.77,39.02 IC34.11 24.13,40.73 | v61.65,50.77 IC33.10 61.59,55.54 v61.59,57.47 | IC31.18 40.37,52.99 25.77,52.99 IC31.11 | v61.65,36.8 IC36.10 61.59,41.57 v61.59,43.81 | IC15.18 40.32,94.3 25.72,94.3 IC15.11 24.08,96.01 | IC7.18 40.32,80.33 25.72,80.33 IC7.11 | IC21.18 40.32,66.36 25.72,66.36 25.57,66.5 | 25.57,66.5 IC21.11 | 25.58,66.51 25.57,66.5 | 60.88,111.84 60.8,111.92 | 60.8,111.92 60.32,112.39 43.19,112.39 40.64,114.95 V2.8 40.16,120.65 38.61,122.2 35.19,122.2 33.64,120.65 V2.5 V2.4 29.86,120.65 28.31,119.1 22.49,119.1 21.97,119.62 21.97,123.13 C.3 | v61.59,106.05 IC6.10 61.59,111.12 60.8,111.92 | v61.59,92.08 IC17.10 v61.59,99.06 | v61.59,78.11 IC14.10 v61.59,85.09 | v61.59,64.14 IC23.10 v61.59,71.12 | IC40.18 40.37,11.08 25.77,11.08 IC40.11 | V3.4 7.62,84.44 6.07,85.99 6.07,91.81 7.62,93.36 V1.8 7.62,98.41 6.07,99.96 6.07,103.24 7.62,104.79 V1.5 | V3.8 6.07,75.21 6.07,79.73 V3.5 | V4.5 7.62,56.53 6.07,54.98 6.07,51.08 V4.8 | V6.7 13.32,27.94 | IC4.18 41.29,109.86 39.74,108.31 26.3,108.31 24.75,109.86 IC4.11 | V5.7 13.32,26.05 13.32,27.94
N$1  (via drill 0.35)
  Top 0.152: v60.38,36.8 IC35.9
  Bottom 0.152: v60.38,36.8 IC36.9 60.38,41.87 59.42,42.83 39.73,42.83 37.5,40.61 IC34.16
N$2  (3 unrouted)
N$3  (3 unrouted)
N$4  (1 unrouted)
  Bottom 0.152: IC31.2 IC31.3 40.41,45.4 14.92,45.4 V6.3 | IC4.2 IC4.3
N$5  (via drill 0.35)
  Top 0.152: v51.44,106.05 IC5.2
  Bottom 0.152: IC6.2 v51.44,106.05 35.56,106.05 IC4.7
N$6  (via drill 0.35)
  Top 0.152: IC5.3 v52.7,106.05 51.12,107.63 30.8,107.63 29.21,109.22 IC4.13
  Bottom 0.152: v52.7,106.05 IC6.3
N$7  (via drill 0.35)
  Top 0.152: v53.98,106.05 IC5.4
  Bottom 0.152: IC6.4 v53.98,106.05 53.34,105.41 37.47,105.41 IC4.6
N$8  (via drill 0.35)
  Top 0.152: IC5.5 v55.24,106.05 53.34,107.95 33.02,107.95 31.75,109.22 IC4.14
  Bottom 0.152: IC6.5 v55.24,106.05
N$9  (via drill 0.35)
  Top 0.152: v56.52,106.05 IC5.6
  Bottom 0.152: IC6.6 v56.52,106.05 55.91,105.44 54,105.44 53.34,104.78 39.37,104.78 IC4.5
N$10  (via drill 0.35)
  Top 0.152: IC5.7 v57.78,106.05 57.37,106.05 56.77,106.65 55.07,106.65 53.47,108.25 35.89,108.25 IC4.15
  Bottom 0.152: IC6.7 v57.78,106.05
N$11  (via drill 0.35)
  Top 0.152: v59.05,106.05 IC5.8
  Bottom 0.152: IC6.8 v59.05,106.05 58.42,105.41 56.31,105.41 56.03,105.13 54.33,105.13 53.34,104.14 41.27,104.14 IC4.4
N$12  (via drill 0.35)  (2 unrouted)
  Top 0.152: v48.74,100.65 49.49,100.65 IC5.1
  Bottom 0.152: V1.11 21.58,102.87 23.76,100.69 24.09,100.69 24.13,100.65 v48.74,100.65
N$14  (3 unrouted)
N$15  (via drill 0.35)
  Top 0.152: IC5.9 v60.33,106.05
  Bottom 0.152: v60.33,106.05 IC6.9 60.33,111.12 59.37,112.08 49.85,112.08 49.18,111.4 39,111.4 37.45,109.86 IC4.16
N$17  (2 unrouted)
  Bottom 0.152: V6.2 11.43,44.45 11.43,50.8 V4.11
N$18  (via drill 0.35, 0.35 pad 0.55)  (2 unrouted)
  Top 0.152: v34.34,36.8 43.23,36.8 IC34.1 | IC15.1 43.18,92.08 v34.61,92.08
  Bottom 0.152: IC34.19 43.88,40.61 41.7,38.42 35.97,38.42 v34.34,36.8 34.13,36.73 | v34.61,92.08 36.51,93.98 42.55,93.98 IC15.19
N$19  (2 unrouted)
  Bottom 0.152: IC34.2 IC34.3 | IC15.2 IC15.3
N$20  (via drill 0.35)  (2 unrouted)
  Top 0.152: v34.34,50.77 43.23,50.77 IC31.1 | v34.29,106.05 43.18,106.05 IC4.1
  Bottom 0.152: IC31.19 43.88,54.58 41.7,52.39 35.97,52.39 v34.34,50.77 34.13,50.73 32.63,52.23 | IC4.19 43.83,109.86 41.64,107.67 35.92,107.67 v34.29,106.05 34.08,106.01
N$22  (via drill 0.35)
  Top 0.152: v51.44,78.11 IC9.2
  Bottom 0.152: IC14.2 v51.44,78.11 35.56,78.11 IC7.7
N$23  (via drill 0.35)
  Top 0.152: IC9.3 v52.7,78.11 51.12,79.69 30.8,79.69 29.21,81.28 IC7.13
  Bottom 0.152: v52.7,78.11 IC14.3
N$24  (via drill 0.35)
  Top 0.152: v53.98,78.11 IC9.4
  Bottom 0.152: IC14.4 v53.98,78.11 53.34,77.47 37.47,77.47 IC7.6
N$25  (via drill 0.35)
  Top 0.152: IC9.5 v55.24,78.11 53.34,80.01 33.02,80.01 31.75,81.28 IC7.14
  Bottom 0.152: IC14.5 v55.24,78.11
N$26  (3 unrouted)
N$27  (1 unrouted)
  Bottom 0.152: IC36.19 50.77,32.79 50.77,33.14 50.64,33.27 49.25,33.27 47.41,31.44 9.2,31.44 V6.5 6.07,34.57 6.07,38.47 6.59,38.99 7.89,38.99 11.75,42.85 11.75,48.58 V4.10
N$28  (via drill 0.35)
  Top 0.152: v56.52,78.11 IC9.6
  Bottom 0.152: IC14.6 v56.52,78.11 55.91,77.5 54,77.5 53.34,76.83 39.37,76.83 IC7.5
N$29  (2 unrouted)
  Top 0.152: V5.10 7.62,19.67 6.07,21.22 6.07,54.98 7.35,56.26 8.65,56.26 9.17,56.78 9.17,60.62 14.97,66.42 16.27,66.42 16.79,66.94 16.79,67.68 15.24,69.23 V3.9
N$30  (via drill 0.35)
  Top 0.152: v34.34,22.83 43.23,22.83 IC37.1 | v34.29,78.11 43.18,78.11 IC7.1 | v23.52,78.11 17.62,72.2 v17.62,23.97 18.73,22.86 v21.59,22.86 19.05,22.86
  Bottom 0.152: IC37.19 43.88,26.64 41.7,24.45 35.97,24.45 v34.34,22.83 21.62,22.83 v21.59,22.86 | IC7.19 43.83,81.92 41.64,79.73 35.92,79.73 v34.29,78.11 v23.52,78.11 | V5.8 8.57,23.18 16.83,23.18 v17.62,23.97
N$31  (1 unrouted)
  Bottom 0.152: IC37.2 IC37.3 40.41,17.46 23.82,17.46 23.29,17.99 23.29,19.89 V6.8 | IC7.2 IC7.3
N$32  (3 unrouted)
N$33  (via drill 0.35)  (2 unrouted)
  Top 0.152: v48.74,18.1 IC38.1
  Bottom 0.152: V5.9 13.32,21.59 14.21,22.48 18.37,22.48 23.69,17.16 47.8,17.16 v48.74,18.1
N$34  (3 unrouted)
N$35  (via drill 0.35)
  Top 0.152: IC9.7 v57.78,78.11 57.37,78.11 56.77,78.71 55.07,78.71 53.47,80.31 35.89,80.31 IC7.15
  Bottom 0.152: IC14.7 v57.78,78.11
N$36  (via drill 0.35)
  Top 0.152: v59.05,78.11 IC9.8
  Bottom 0.152: IC14.8 v59.05,78.11 58.42,77.47 56.31,77.47 56.03,77.19 54.33,77.19 53.34,76.2 41.27,76.2 IC7.4
N$37  (via drill 0.35)
  Top 0.152: v60.33,78.11 IC9.9
  Bottom 0.152: v60.33,78.11 IC14.9 60.33,83.18 59.37,84.14 39.67,84.14 37.45,81.92 IC7.16
N$40  (3 unrouted)
N$41  (via drill 0.35)
  Top 0.152: v51.44,92.08 IC16.2
  Bottom 0.152: IC17.2 v51.44,92.08 35.56,92.08 IC15.7
N$42  (via drill 0.35)
  Top 0.152: IC16.3 v52.7,92.08 51.12,93.66 30.8,93.66 29.21,95.25 IC15.13
  Bottom 0.152: v52.7,92.08 IC17.3
N$43  (via drill 0.35)
  Top 0.152: v53.98,92.08 IC16.4
  Bottom 0.152: IC17.4 v53.98,92.08 53.34,91.44 37.47,91.44 IC15.6
N$44  (via drill 0.35)
  Top 0.152: IC16.5 v55.24,92.08 53.34,93.98 33.02,93.98 31.75,95.25 IC15.14
  Bottom 0.152: IC17.5 v55.24,92.08
N$45  (via drill 0.35)
  Top 0.152: v56.52,92.08 IC16.6
  Bottom 0.152: IC17.6 v56.52,92.08 55.91,91.47 54,91.47 53.34,90.81 39.37,90.81 IC15.5
N$46  (via drill 0.35)
  Top 0.152: IC16.7 v57.78,92.08 57.37,92.08 56.77,92.68 55.07,92.68 53.47,94.28 35.89,94.28 IC15.15
  Bottom 0.152: IC17.7 v57.78,92.08
N$47  (via drill 0.35)
  Top 0.152: v59.05,92.08 IC16.8
  Bottom 0.152: IC17.8 v59.05,92.08 58.42,91.44 56.31,91.44 56.03,91.16 54.33,91.16 53.34,90.17 41.27,90.17 IC15.4
N$48  (via drill 0.35)
  Top 0.152: v60.33,92.08 IC16.9
  Bottom 0.152: v60.33,92.08 IC17.9 60.33,97.15 59.37,98.11 39.67,98.11 37.45,95.89 IC15.16
N$50  (via drill 0.35)  (1 unrouted)
  Top 0.152: v34.34,8.86 43.23,8.86 IC40.1 | v34.29,64.14 43.18,64.14 IC21.1
  Bottom 0.152: IC40.19 43.88,12.67 41.7,10.48 35.97,10.48 34.67,9.19 | 34.67,9.19 v34.34,8.86 17.12,8.86 16.27,8 10.89,8 8.73,10.16 6.35,10.16 5.71,10.79 5.71,14.61 V5.11 | 34.63,9.23 34.67,9.19 | IC21.19 43.83,67.94 41.64,65.76 35.92,65.76 34.62,64.47 | 34.62,64.47 v34.29,64.14 | 34.58,64.51 34.62,64.47
N$51  (2 unrouted)
  Top 0.152: 50.08,58.51 50.08,59.01 IC22.1 | IC41.1 50.22,3.76 49,2.54 12.05,2.54 6.07,8.52 6.07,11.8 7.62,13.35 V5.12
N$52  (via drill 0.35)  (1 unrouted)
  Top 0.152: V4.7 11.43,48.26 11.43,44.45 V6.13 14.66,40.06 13.91,40.06 9.17,35.32 9.17,16.14 8.27,15.24 6.97,15.24 5.77,14.03 5.77,7.89 v10.79,2.86
  Bottom 0.152: IC42.19 50.77,3.42 50.77,3.06 50.64,2.93 10.87,2.93 v10.79,2.86
N$55  (via drill 0.35)  (2 unrouted)
  Top 0.152: IC22.19 50.77,69.52 50.77,71.37 50.42,71.73 50.2,71.73 48.55,73.37 48.55,78.96 48.14,79.38 v27.46,79.38 | V6.12 15.24,38.29 17.25,40.3 17.25,73.13 v23.5,79.38
  Bottom 0.152: v27.46,79.38 v23.5,79.38
N$63  (via drill 0.35)
  Top 0.152: v51.44,64.14 IC22.2
  Bottom 0.152: IC23.2 v51.44,64.14 35.56,64.14 IC21.7
N$64  (via drill 0.35)
  Top 0.152: IC22.3 v52.7,64.14 51.12,65.72 30.8,65.72 29.21,67.31 IC21.13
  Bottom 0.152: v52.7,64.14 IC23.3
N$65  (via drill 0.35)
  Top 0.152: v53.98,64.14 IC22.4
  Bottom 0.152: IC23.4 v53.98,64.14 53.34,63.5 37.47,63.5 IC21.6
N$66  (via drill 0.35)
  Top 0.152: IC22.5 v55.24,64.14 53.34,66.04 33.02,66.04 31.75,67.31 IC21.14
  Bottom 0.152: IC23.5 v55.24,64.14
N$67  (via drill 0.35)
  Top 0.152: v56.52,64.14 IC22.6
  Bottom 0.152: IC23.6 v56.52,64.14 55.91,63.53 54,63.53 53.34,62.87 39.37,62.87 IC21.5
N$68  (via drill 0.35)
  Top 0.152: IC22.7 v57.78,64.14 57.37,64.14 56.77,64.74 55.07,64.74 53.47,66.34 35.89,66.34 IC21.15
  Bottom 0.152: IC23.7 v57.78,64.14
N$69  (via drill 0.35)
  Top 0.152: v59.05,64.14 IC22.8
  Bottom 0.152: IC23.8 v59.05,64.14 58.42,63.5 56.31,63.5 56.03,63.22 54.33,63.22 53.34,62.23 41.27,62.23 IC21.4
N$70  (via drill 0.35)
  Top 0.152: v60.33,64.14 IC22.9
  Bottom 0.152: v60.33,64.14 IC23.9 60.33,69.21 59.37,70.17 39.67,70.17 37.45,67.94 IC21.16
N$121  (via drill 0.35)
  Top 0.152: v51.49,50.77 IC32.2
  Bottom 0.152: IC33.2 v51.49,50.77 35.61,50.77 IC31.7
N$122  (via drill 0.35)
  Top 0.152: IC32.3 v52.76,50.77 51.17,52.35 30.85,52.35 29.26,53.94 IC31.13
  Bottom 0.152: v52.76,50.77 IC33.3
N$125  (via drill 0.35)
  Top 0.152: v54.03,50.77 IC32.4
  Bottom 0.152: IC33.4 v54.03,50.77 53.39,50.13 37.52,50.13 IC31.6
N$126  (via drill 0.35)
  Top 0.152: IC32.5 v55.3,50.77 53.39,52.67 33.07,52.67 31.8,53.94 IC31.14
  Bottom 0.152: IC33.5 v55.3,50.77
N$129  (via drill 0.35)
  Top 0.152: v56.57,50.77 IC32.6
  Bottom 0.152: IC33.6 v56.57,50.77 55.96,50.16 54.05,50.16 53.39,49.5 39.42,49.5 IC31.5
N$130  (via drill 0.35)
  Top 0.152: IC32.7 v57.84,50.77 57.42,50.77 56.82,51.37 55.12,51.37 53.52,52.98 35.94,52.98 IC31.15
  Bottom 0.152: IC33.7 v57.84,50.77
N$131  (via drill 0.35)
  Top 0.152: v59.11,50.77 IC32.8
  Bottom 0.152: IC33.8 v59.11,50.77 58.47,50.13 56.36,50.13 56.09,49.85 54.38,49.85 53.39,48.86 41.33,48.86 IC31.4
N$132  (via drill 0.35)
  Top 0.152: IC32.9 v60.38,50.77
  Bottom 0.152: v60.38,50.77 IC33.9 60.38,55.84 59.42,56.8 39.73,56.8 37.5,54.58 IC31.16
N$133  (via drill 0.35)
  Top 0.152: v51.49,36.8 IC35.2
  Bottom 0.152: IC36.2 v51.49,36.8 35.61,36.8 IC34.7
N$134  (via drill 0.35)
  Top 0.152: IC35.3 v52.76,36.8 51.17,38.38 30.85,38.38 29.26,39.97 IC34.13
  Bottom 0.152: v52.76,36.8 IC36.3
N$135  (via drill 0.35)
  Top 0.152: v54.03,36.8 IC35.4
  Bottom 0.152: IC36.4 v54.03,36.8 53.39,36.16 37.52,36.16 IC34.6
N$136  (via drill 0.35)
  Top 0.152: IC35.5 v55.3,36.8 53.39,38.7 33.07,38.7 31.8,39.97 IC34.14
  Bottom 0.152: IC36.5 v55.3,36.8
N$139  (via drill 0.35)
  Top 0.152: v56.57,36.8 IC35.6
  Bottom 0.152: IC36.6 v56.57,36.8 55.96,36.19 54.05,36.19 53.39,35.53 39.42,35.53 IC34.5
N$140  (via drill 0.35)
  Top 0.152: IC35.7 v57.84,36.8 57.42,36.8 56.82,37.4 55.12,37.4 53.52,39.01 35.94,39.01 IC34.15
  Bottom 0.152: IC36.7 v57.84,36.8
N$141  (via drill 0.35)
  Top 0.152: v59.11,36.8 IC35.8
  Bottom 0.152: IC36.8 v59.11,36.8 58.47,36.16 56.36,36.16 56.09,35.88 54.38,35.88 53.39,34.89 41.33,34.89 IC34.4
N$143  (via drill 0.35)
  Top 0.152: v51.49,22.83 IC38.2
  Bottom 0.152: IC39.2 v51.49,22.83 35.61,22.83 IC37.7
N$144  (via drill 0.35)
  Top 0.152: IC38.3 v52.76,22.83 51.17,24.41 30.85,24.41 29.26,26 IC37.13
  Bottom 0.152: v52.76,22.83 IC39.3
N$145  (via drill 0.35)
  Top 0.152: v54.03,22.83 IC38.4
  Bottom 0.152: IC39.4 v54.03,22.83 53.39,22.19 37.52,22.19 IC37.6
N$146  (via drill 0.35)
  Top 0.152: IC38.5 v55.3,22.83 53.39,24.73 33.07,24.73 31.8,26 IC37.14
  Bottom 0.152: IC39.5 v55.3,22.83
N$149  (via drill 0.35)
  Top 0.152: v56.57,22.83 IC38.6
  Bottom 0.152: IC39.6 v56.57,22.83 55.96,22.22 54.05,22.22 53.39,21.56 39.42,21.56 IC37.5
N$150  (via drill 0.35)
  Top 0.152: IC38.7 v57.84,22.83 57.42,22.83 56.82,23.43 55.12,23.43 53.52,25.04 35.94,25.04 IC37.15
  Bottom 0.152: IC39.7 v57.84,22.83
N$151  (via drill 0.35)
  Top 0.152: v59.11,22.83 IC38.8
  Bottom 0.152: IC39.8 v59.11,22.83 58.47,22.19 56.36,22.19 56.09,21.91 54.38,21.91 53.39,20.92 41.33,20.92 IC37.4
N$152  (via drill 0.35)
  Top 0.152: v60.38,22.83 IC38.9
  Bottom 0.152: v60.38,22.83 IC39.9 60.38,27.9 59.42,28.86 39.73,28.86 37.5,26.64 IC37.16
N$153  (via drill 0.35)
  Top 0.152: v51.49,8.86 IC41.2
  Bottom 0.152: IC42.2 v51.49,8.86 35.61,8.86 IC40.7
N$154  (via drill 0.35)
  Top 0.152: IC41.3 v52.76,8.86 51.17,10.44 30.85,10.44 29.26,12.03 IC40.13
  Bottom 0.152: v52.76,8.86 IC42.3
N$155  (via drill 0.35)
  Top 0.152: v54.03,8.86 IC41.4
  Bottom 0.152: IC42.4 v54.03,8.86 53.39,8.22 37.52,8.22 IC40.6
N$156  (via drill 0.35)
  Top 0.152: IC41.5 v55.3,8.86 53.39,10.76 33.07,10.76 31.8,12.03 IC40.14
  Bottom 0.152: IC42.5 v55.3,8.86
N$157  (1 unrouted)
  Top 0.152: IC40.3 41.34,5.05 39.79,3.5 26.04,3.5 26.04,3.49 16.83,3.49 13.65,6.67 13.65,33.97 V6.11
  Bottom 0.152: IC21.2 IC21.3 | IC40.2 IC40.3
N$159  (via drill 0.35)
  Top 0.152: v56.57,8.86 IC41.6
  Bottom 0.152: IC42.6 v56.57,8.86 55.96,8.25 54.05,8.25 53.39,7.59 39.42,7.59 IC40.5
N$160  (via drill 0.35)
  Top 0.152: IC41.7 v57.84,8.86 57.42,8.86 56.82,9.46 55.12,9.46 53.52,11.07 35.94,11.07 IC40.15
  Bottom 0.152: IC42.7 v57.84,8.86
N$161  (via drill 0.35)
  Top 0.152: v59.11,8.86 IC41.8
  Bottom 0.152: IC42.8 v59.11,8.86 58.47,8.22 56.36,8.22 56.09,7.94 54.38,7.94 53.39,6.95 41.33,6.95 IC40.4
N$162  (via drill 0.35)
  Top 0.152: v60.38,8.86 IC41.9
  Bottom 0.152: v60.38,8.86 IC42.9 60.38,13.93 59.42,14.89 39.1,14.89 IC40.16
N$163  (via drill 0.35)  (3 unrouted)
  Bottom 0.152: 50.08,110.51 IC6.1 | v49.13,54.73 49.63,54.73 50.13,55.23 IC33.1
STARTUP  (1 unrouted)
  Top 0.152: IC21.9 26.02,60.33 25.78,60.57 25.78,71.92 26.67,72.81 IC7.9 26.67,75.78 25.78,76.67 25.78,85.89 26.67,86.78 IC15.9 26.67,89.75 25.78,90.64 25.78,99.86 26.67,100.75 IC4.9 26.67,103.72 25.78,104.61 25.78,110.3 23.82,112.26 23.82,121.6 23.82,121.61 23.82,122.43 23.15,123.1 23.15,125.06 C.6 | IC40.9 26.72,10.75 25.83,11.64 25.83,16.64 26.72,17.53 IC37.9 26.72,20.5 25.83,21.39 25.83,30.61 26.72,31.5 IC34.9 26.72,34.47 25.83,35.36 25.83,44.58 26.72,45.47 IC31.9
  Bottom 0.152: 27.08,60.01 IC21.9 | 27.13,4.73 IC40.9
VCC  (via drill 0.35)  (2 unrouted)
  Top 0.152: IC15.20 47.91,96.8 | IC7.20 47.91,82.83 | IC5.20 47.91,110.77 IC4.20 46.99,116.22 40.99,122.22 37.13,122.22 V2.6 | 50.16,68.58 IC22.20 | IC22.20 47.91,68.86 IC21.20 47.94,68.9 v47.94,78.71 | 47.91,82.83 IC9.20 | 47.91,96.8 IC16.20 v50.16,99.03 | IC34.20 47.94,41.51 | 50.22,41.24 IC35.20 | 50.22,27.27 IC38.20 | 50.22,13.3 IC41.20 | v50.16,85.06 50.16,83.47 | IC22.20 v50.16,71.12 | v50.16,57.47 50.16,56.13 | IC35.20 50.16,41.57 v50.16,43.81 | v50.16,29.84 50.16,27.6 IC38.20 | v50.16,15.88 50.22,15.82 IC41.20 | IC41.20 50.22,13.57 47.94,13.57 | C.2 C.1 15.24,119.7 V1.16 | V4.16 11.43,71.12 11.43,74.93 V3.6 | V5.14 9.68,10.95 9.68,35.4 14.03,39.75 16.27,39.75 16.79,40.27 16.79,41.01 15.24,42.56 V6.14 11.75,46.67 11.75,50.48 V4.6 | v47.94,23.49 47.94,13.57 | v47.94,51.44 47.94,41.51 | v47.94,64.77 47.94,55.48 IC31.20 47.96,55.49 IC32.20 | v47.94,37.47 47.94,27.54 | IC37.20 47.94,27.54 | IC40.20 47.94,13.57 | 47.91,82.83 47.94,82.87 v47.94,92.71 | 47.91,96.8 47.94,96.84 v47.94,106.65 | IC38.20 50.2,27.54 47.94,27.54 | 47.94,41.51 47.96,41.52 IC35.20 | v48.58,9.62 v48.58,6.34
  Bottom 0.152: 50.08,59.01 IC23.20 v50.16,57.47 | 50.13,3.73 50.18,3.94 | 50.18,3.94 IC42.20 | 50.13,17.73 IC39.20 50.22,15.93 v50.16,15.88 | v50.16,99.03 IC6.20 | IC17.20 v50.16,85.06 | v50.16,71.12 IC14.20 | v50.16,43.81 50.16,45.99 IC33.20 | IC36.20 50.22,29.9 v50.16,29.84 | V4.6 11.43,58.42 11.43,63.5 V4.16 | v47.94,23.49 47.04,24.39 IC37.20 | v47.94,37.47 47.04,38.37 IC34.20 | v47.94,51.44 47.04,52.34 IC31.20 | v47.94,64.77 46.99,65.72 IC21.20 | v47.94,78.71 46.99,79.66 IC7.20 | v47.94,92.71 46.99,93.66 IC15.20 | v47.94,106.65 46.99,107.6 IC4.20 | IC40.20 47.04,11.16 v48.58,9.62 | v48.58,6.34 50.18,4.75 50.18,3.94 | V2.6 34.94,120.65 33.39,119.1 28.93,119.1 V2.16 20.32,115.57 V1.16 14.62,115.57 11.44,112.39 11.44,106.69 V1.6 9.21,101.28 9.17,101.24 9.17,91.44 | V3.6 7.62,79.36 9.17,80.91 9.17,91.44 | V3.16 9.17,91.44